# Altium PCB PCB2.PcbDoc
Units mm, origin at the board's own origin, x right, y up, seen from the top; angles counter-clockwise.
Board outline 60 x 60 mm, 2 copper layers (Top Layer, Bottom Layer); 89 components, 68 nets, 306 pads, 0 vias.
Unrouted connection lines stored in the file: 214.
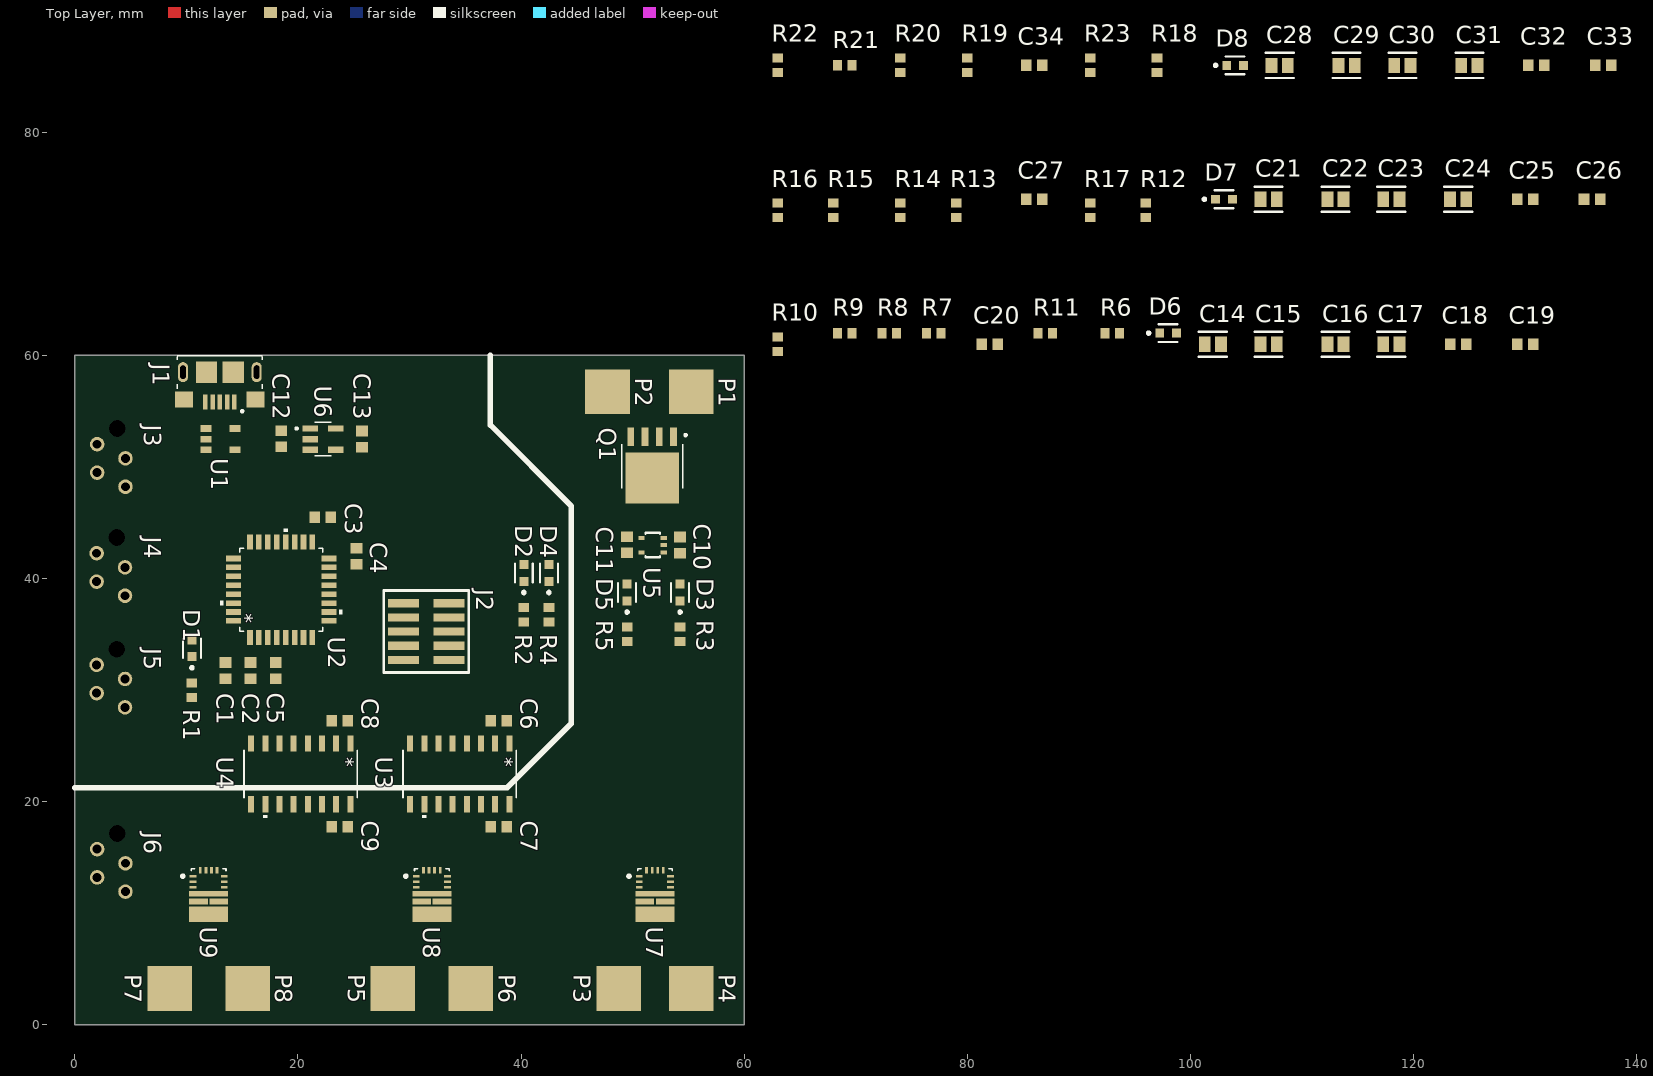
[diagram p0: Top Layer view]
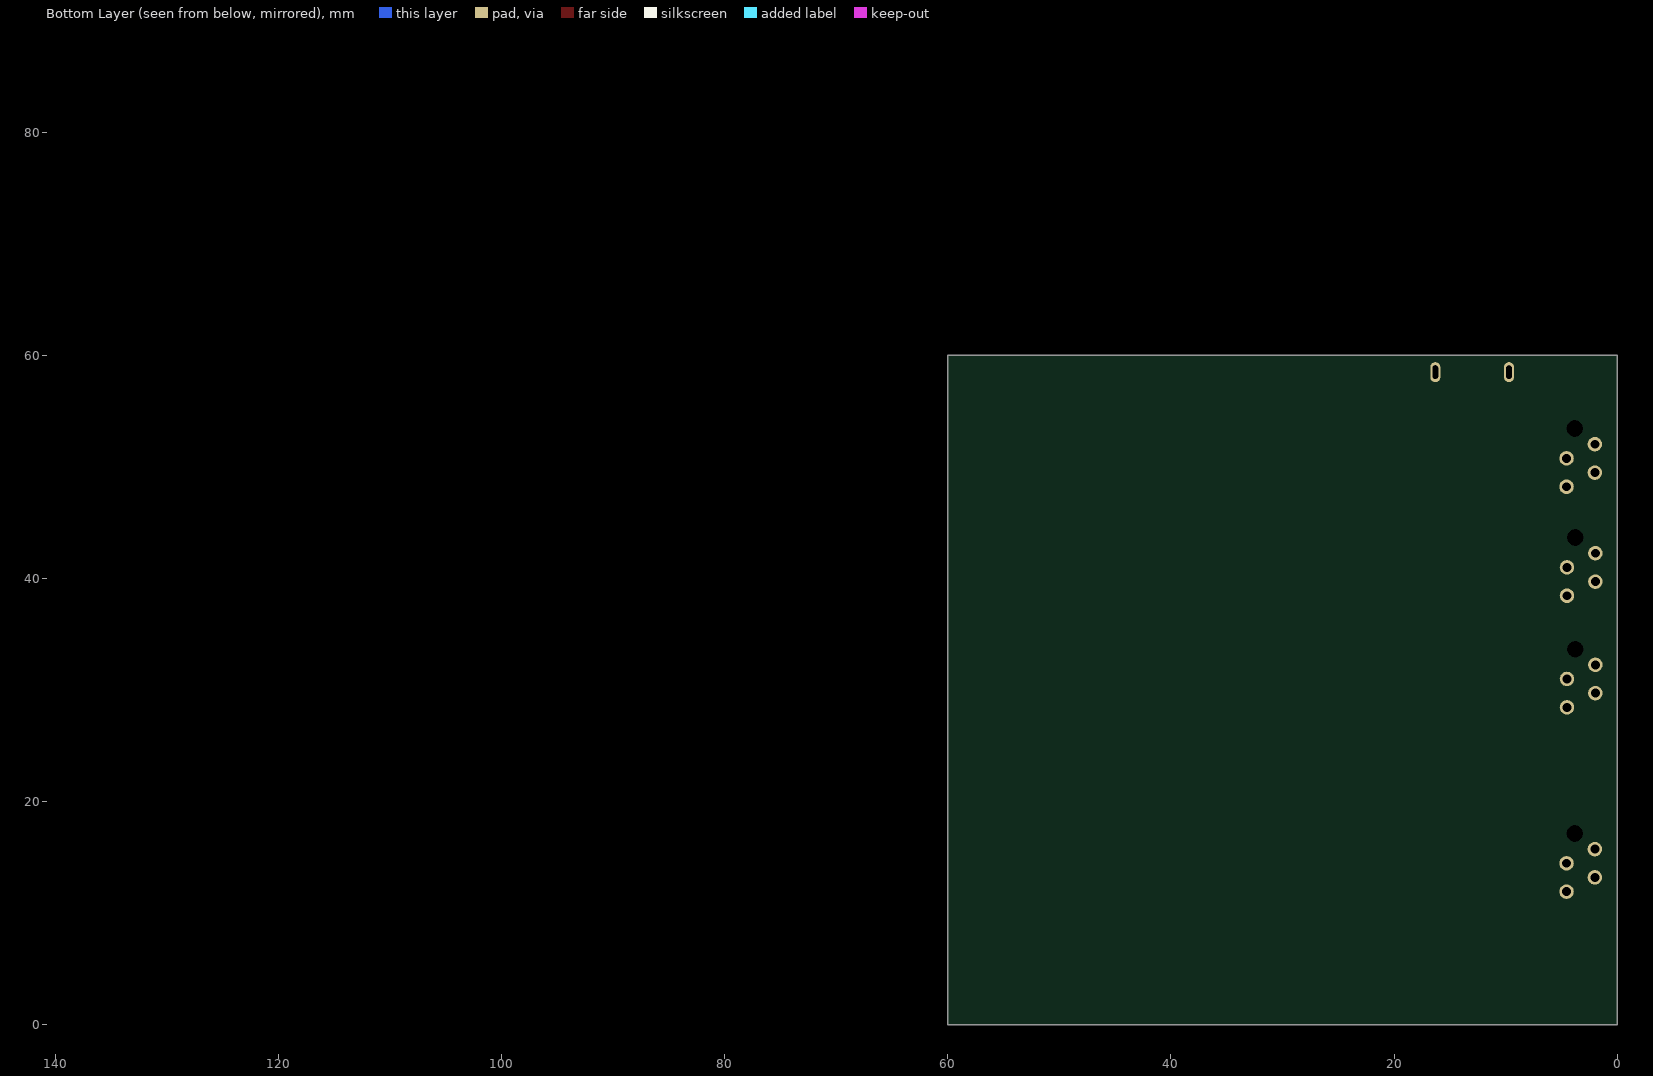
[diagram p1: Bottom Layer view, seen from below]

## Layer stack, top to bottom
Top Solder: solder mask 0.0102, Solder Resist, Dk 3.5
Top Layer: signal copper 0.0356
Dielectric 1: dielectric 0.32, FR-4, Dk 4.8
Bottom Layer: signal copper 0.0356
Bottom Solder: solder mask 0.0102, Solder Resist, Dk 3.5

## Board outline
0,0 60,0 60,60 0,60

## Design rules (kind name [scope] priority, off if disabled: settings)
Clearance [All] p1: gap=0.2 ignorepadtopadclearanceinfootprint=TRUE
PolygonConnect [All] p1: connectstyle=Relief reliefconductorwidth=0.254 reliefentries=4 polygonreliefangle="90 Angle" airgapwidth=0.254
RoutingVias [All] p1: holewidth=0.711 width=1.27 viastyle="Through Hole" minholewidth=0.711 minwidth=1.27 maxholewidth=0.711 maxwidth=1.27
SolderMaskExpansion [All] p1: expansion=0.102 istentingtop=FALSE
Width [All] p1: maxlimit=0.254 minlimit=0.254 preferedwidth=0.254
30 further rules are at their usual default settings.

## Classes and differential pairs
component class MCU_3: C28 C29 C30 C31 C32 C33 C34 D8 R18 R19 R20 R21 R22 R23 U9
component class MCU_2: C21 C22 C23 C24 C25 C26 C27 D7 R12 R13 R14 R15 R16 R17 U8
component class MCU_1: C14 C15 C16 C17 C18 C19 C20 D6 R6 R7 R8 R9 R10 R11 U7
component class mainboard_valdis: C1 C2 C3 C4 C5 C6 C7 C8 C9 C10 C11 C12 C13 D1 D2 D3 D4 D5 J1 J2 J3 J4 J5 J6 P1 P2 P3 P4 P5 P6 P7 P8 Q1 R1 R2 R3 R4 R5 U1 U2 U3 U4 U5 U6

## Components (designator, comment, footprint, x,y, rotation, side; value= is the part's Value field where it differs from the comment)
C1 "4.7uF" CAPC1608X90X35ML10T15 13.5,31.75 r90 top
C2 "100nF" CAPC1608X90X35ML10T15 15.75,31.75 r90 top
C3 "100nF" CAPC1608X90X35ML10T15 22.225,45.5 r180 top
C4 "100nF" CAPC1608X90X35ML10T15 25.25,42 r270 top
C5 "100nF" CAPC1608X90X35ML10T15 18,31.75 r90 top
C6 "100nF" CAPC1608X90X35ML10T15 38,27.25 r0 top
C7 "100nF" CAPC1608X90X35ML10T15 38,17.75 r0 top
C8 "100nF" CAPC1608X90X35ML10T15 23.75,27.25 r0 top
C9 "100nF" CAPC1608X90X35ML10T15 23.75,17.75 r0 top
C10 "1uF" CAPC1608X90X35ML10T15 54.25,43 r90 top
C11 "1uF" CAPC1608X90X35ML10T15 49.5,43.025 r270 top
C12 "1uF" CAPC1608X90X35ML10T15 18.5,52.525 r90 top
C13 "1uF" CAPC1608X90X35ML10T15 25.75,52.5 r90 top
C14 "100uF" FP-CL21-IPC_C 102,61 r0 top
C15 "100uF" FP-CL21-IPC_C 107,61 r0 top
C16 "100uF" FP-CL21-IPC_C 113,61 r0 top
C17 "100uF" FP-CL21-IPC_C 118,61 r0 top
C18 "4.7uF" CAPC1608X90X35ML10T15 124,61 r0 top
C19 "100nF" CAPC1608X90X35ML10T15 130,61 r0 top
C20 "100nF" CAPC1608X90X35ML10T15 82,61 r0 top
C21 "100uF" FP-CL21-IPC_C 107,74 r0 top
C22 "100uF" FP-CL21-IPC_C 113,74 r0 top
C23 "100uF" FP-CL21-IPC_C 118,74 r0 top
C24 "100uF" FP-CL21-IPC_C 124,74 r0 top
C25 "4.7uF" CAPC1608X90X35ML10T15 130,74 r0 top
C26 "100nF" CAPC1608X90X35ML10T15 136,74 r0 top
C27 "100nF" CAPC1608X90X35ML10T15 86,74 r0 top
C28 "100uF" FP-CL21-IPC_C 108,86 r0 top
C29 "100uF" FP-CL21-IPC_C 114,86 r0 top
C30 "100uF" FP-CL21-IPC_C 119,86 r0 top
C31 "100uF" FP-CL21-IPC_C 125,86 r0 top
C32 "4.7uF" CAPC1608X90X35ML10T15 131,86 r0 top
C33 "100nF" CAPC1608X90X35ML10T15 137,86 r0 top
C34 "100nF" CAPC1608X90X35ML10T15 86,86 r0 top
D1 "LTST-C191TBKT" FP-LTST-C191TBKT-MFG 10.5,33.75 r90 top
D2 "LTST-C191TBKT" FP-LTST-C191TBKT-MFG 40.25,40.5 r90 top
D3 "LTST-C191TBKT" FP-LTST-C191TBKT-MFG 54.25,38.75 r90 top
D4 "LTST-C191TBKT" FP-LTST-C191TBKT-MFG 42.5,40.5 r90 top
D5 "LTST-C191TBKT" FP-LTST-C191TBKT-MFG 49.5,38.75 r90 top
D6 "LTST-C191TBKT" FP-LTST-C191TBKT-MFG 98,62 r0 top
D7 "LTST-C191TBKT" FP-LTST-C191TBKT-MFG 103,74 r0 top
D8 "LTST-C191TBKT" FP-LTST-C191TBKT-MFG 104,86 r0 top
J1 "10118193-0001LF" FCI_10118193-0001LF 13,58.5 r180 top
J2 "FTSH-105-01-L-DV-K" FTSH-105-01-XXX-DV-K 31.5,35.25 r90 top
J3 "microMatch4" microMatch4 2,52.04 r90 top
J4 "microMatch4" microMatch4 1.96,42.27 r90 top
J5 "microMatch4" microMatch4 1.96,32.27 r90 top
J6 "microMatch4" microMatch4 2,15.75 r90 top
P1 "BAT+" PCBComponent_1 55.25,56.75 r0 top
P2 "BAT-" PCBComponent_1 47.75,56.75 r0 top
P3 "M1+" PCBComponent_1 48.75,3.25 r0 top
P4 "M1-" PCBComponent_1 55.25,3.25 r0 top
P5 "M2+" PCBComponent_1 28.5,3.25 r0 top
P6 "M2-" PCBComponent_1 35.5,3.25 r0 top
P7 "M3+" PCBComponent_1 8.5,3.25 r0 top
P8 "M3-" PCBComponent_1 15.5,3.25 r0 top
Q1 "BUK6Y10-30PX" TO127P600X120-5N 51.75,50.06 r180 top
R1 "1K" RESC1609X50X30NL8T20 10.5,30 r90 top
R2 "1K" RESC1609X50X30NL8T20 40.25,36.75 r90 top
R3 "1K" RESC1609X50X30NL8T20 54.25,35 r90 top
R4 "1K" RESC1609X50X30NL8T20 42.5,36.75 r90 top
R5 "1K" RESC1609X50X30NL8T20 49.5,35 r90 top
R6 "1K" RESC1609X50X30NL8T20 93,62 r0 top
R7 "0" RESC1609X50X30NL8T20 77,62 r0 top
R8 "4K7" RESC1609X50X30NL8T20 73,62 r0 top
R9 "0" RESC1609X50X30NL8T20 69,62 r0 top
R10 "0" RESC1609X50X30NL8T20 63,61 r90 top
R11 "2K2" RESC1609X50X30NL8T20 87,62 r0 top
R12 "1K" RESC1609X50X30NL8T20 96,73 r90 top
R13 "0" RESC1609X50X30NL8T20 79,73 r90 top
R14 "4K7" RESC1609X50X30NL8T20 74,73 r90 top
R15 "0" RESC1609X50X30NL8T20 68,73 r90 top
R16 "0" RESC1609X50X30NL8T20 63,73 r90 top
R17 "2K2" RESC1609X50X30NL8T20 91,73 r90 top
R18 "1K" RESC1609X50X30NL8T20 97,86 r90 top
R19 "0" RESC1609X50X30NL8T20 80,86 r90 top
R20 "4K7" RESC1609X50X30NL8T20 74,86 r90 top
R21 "0" RESC1609X50X30NL8T20 69,86 r0 top
R22 "0" RESC1609X50X30NL8T20 63,86 r90 top
R23 "2K2" RESC1609X50X30NL8T20 91,86 r90 top
U1 "CM1223" SOT23-5 11.75,52.5 r270 top
U2 "STM32G441KBT3" LQFP32_7X7_STM 18.5,39 r90 top
U3 "MAX14930DASE+" 21-0041_S16+1_MXM 34.5,22.5 r270 top
U4 "MAX14930DASE+" 21-0041_S16+1_MXM 20.25,22.5 r270 top
U5 "NCV8730ASN500T1G" TSSOP5 51.75,43 r90 top
U6 "NCP164CSN330T1G" SOP95P275X110-5N 22.25,52.5 r0 top
U7 "PDRV8243HRXYQ1" RXY0014A-MFG 52,11.7 r0 top
U8 "PDRV8243HRXYQ1" RXY0014A-MFG 32,11.7 r0 top
U9 "PDRV8243HRXYQ1" RXY0014A-MFG 12,11.7 r0 top

## Footprints (in the part's own frame and the unit in brackets; to place one, negate y for a bottom-side part, rotate by r counter-clockwise, add the part's x,y. Pads: shape width x height; smd on the part's side, far side on the other; paste and mask are expansions set on the pad)
21-0041_S16+1_MXM [mm]
  rect 1.456x0.533 smd paste+0 mask+0: 1(-2.722,4.445) 2(-2.722,3.175) 3(-2.722,1.905) 4(-2.722,0.635) 5(-2.722,-0.635) 6(-2.722,-1.905) 7(-2.722,-3.175) 8(-2.722,-4.445) 9(2.722,-4.445) 10(2.722,-3.175) 11(2.722,-1.905) 12(2.722,-0.635) 13(2.722,0.635) 14(2.722,1.905) 15(2.722,3.175) 16(2.722,4.445)
  silkscreen extent -2.12,-5.08 3.96,5.08, body extent -3.1,-4.95 3.1,4.95, height 1.76
CAPC1608X90X35ML10T15 [mm] "Chip Capacitor, 2-Leads, Body 1.7x0.9mm, IPC Low Density"
  rect 0.95x1.05 smd: 1(-0.725,0) 2(0.725,0)
  body extent -0.85,-0.45 0.85,0.45, height 0.9
FCI_10118193-0001LF [mm]
  rect 0.4x1.35 smd: 1(-1.3,2.675) 2(-0.65,2.675) 3(0,2.675) 4(0.65,2.675) 5(1.3,2.675)
  rect 1.6x1.4 smd: S1(-3.2,2.45) S2(3.2,2.45)
  rect 1.9x1.9 smd: S3(1.2,0) S4(-1.2,0)
  oval 0.9x1.8 hole 0.5 slot 1.2 at 90 deg: S5(-3.3,0) S6(3.3,0)
  silkscreen extent -3.8,-1.45 3.8,3.6
FP-CL21-IPC_C [mm]
  rect 1.055x1.356 smd paste+0 mask+0: 1(-0.726,0) 2(0.726,0)
  silkscreen extent -1.25,-1.12 1.25,1.12, body extent -1.35,-0.82 1.35,0.82, height 0.25
FP-LTST-C191TBKT-MFG [mm]
  rect 0.8x0.8 smd paste+0 mask+0: 1(-0.75,0) 2(0.75,0)
  silkscreen extent -1.87,-0.8 0.85,0.8, body extent -1.25,-0.55 1.25,0.55, height 0.25
FTSH-105-01-XXX-DV-K [mil]
  rect 29x110 smd mask+2: 1(-100,-80) 2(-100,80) 3(-50,-80) 4(-50,80) 5(0,-80) 6(0,80) 7(50,-80) 8(50,80) 9(100,-80) 10(100,80)
  silkscreen extent -145,-150 145,150
LQFP32_7X7_STM [mm]
  rect 1.359x0.501 smd paste+0 mask+0: 1(-4.274,2.8) 2(-4.274,2) 3(-4.274,1.2) 4(-4.274,0.4) 5(-4.274,-0.4) 6(-4.274,-1.2) 7(-4.274,-2) 8(-4.274,-2.8) 17(4.274,-2.8) 18(4.274,-2) 19(4.274,-1.2) 20(4.274,-0.4) 21(4.274,0.4) 22(4.274,1.2) 23(4.274,2) 24(4.274,2.8)
  rect 0.501x1.359 smd paste+0 mask+0: 9(-2.8,-4.274) 10(-2,-4.274) 11(-1.2,-4.274) 12(-0.4,-4.274) 13(0.4,-4.274) 14(1.2,-4.274) 15(2,-4.274) 16(2.8,-4.274) 25(2.8,4.274) 26(2,4.274) 27(1.2,4.274) 28(0.4,4.274) 29(-0.4,4.274) 30(-1.2,4.274) 31(-2,4.274) 32(-2.8,4.274)
  silkscreen extent -3.72,-5.46 5.46,5.46, body extent 0,0 0.25,0.25, height 0.25
microMatch4 [mm]
  round 1.3 hole 0.8: 1(0,0) 2(-1.27,-2.54) 3(-2.54,0) 4(-3.81,-2.54)
  round 0 hole 1.5 unplated: drill(1.4,-1.8)
  body extent -5.41,-3.77 1.6,1.23, height 4
PCBComponent_1 [mm]
  rect 4x4 smd: 1(0,0)
RESC1609X50X30NL8T20 [mm] "Chip Resistor, 2-Leads, Body 1.65x0.95mm, IPC Medium Density"
  rect 0.8x0.95 smd: 1(-0.65,0) 2(0.65,0)
  body extent -0.82,-0.48 0.82,0.48, height 0.5
RXY0014A-MFG [mm]
  rect 0.6x0.25 smd paste+0 mask-0.292: 1(-1.4,1.625) 2(-1.4,1.125) 3(-1.4,0.625) 8(1.4,0.625) 9(1.4,1.125) 10(1.4,1.625)
  rect 3.5x0.5 smd paste-1.737 mask-1.74: 4(0,0.05)
  rect 1.675x0.5 smd paste-0.825 mask-0.826: 5(-0.913,-0.65) 7(0.913,-0.65)
  rect 3.5x1.4 smd paste-1.737 mask-1.74: 6(0,-1.8)
  rect 0.25x0.6 smd paste+0 mask-0.292: 11(0.75,2.15) 12(0.25,2.15) 13(-0.25,2.15) 14(-0.75,2.15)
  silkscreen extent -2.45,1.5 1.55,2.3, body extent 0,0 0.25,0.25, height 0.25
SOP95P275X110-5N [mm]
  rect 1.42x0.58 smd: 1(-1.145,0.95) 2(-1.145,0) 3(-1.145,-0.95) 4(1.145,-0.95) 5(1.145,0.95)
  silkscreen extent -2.46,-1.5 0.75,1.5
SOT23-5 [mm] "SOT143-4 as used in SP0503BAHTG"
  round 0.4 on Top Overlay: 1(-1.7,0)
  rect 0.6x1 smd: 1(-0.95,0) 2(0,0) 3(0.95,0) 4(0.95,2.6) 5(-0.95,2.6)
  body extent -1.46,0.13 1.46,2.47, height 1
TO127P600X120-5N [mm]
  rect 0.6x1.62 smd: 1(-1.905,-2.65) 2(-0.635,-2.65) 3(0.635,-2.65) 4(1.905,-2.65)
  rect 4.8x4.58 smd paste-3: 5(0,1.06)
  silkscreen extent -3.1,-2.9 2.72,1.97
TSSOP5 [mm]
  rect 0.35x0.55 smd: 1(-0.65,-1.04) 2(0,-1.04) 3(0.65,-1.04) 4(0.65,0.95) 5(-0.65,0.94)
  silkscreen extent -1.1,-0.7 1.1,0.6

## Part data
C1 C2 C3 C4 C5 C6 C7 C8 C9 C10 C11 C12 C13 C18 C19 C20 C25 C26 C27 C32 C33 C34: library part CMP-2000-04945-1, "Chip Capacitor, 22 pF, +/- 5%, 50 V, -55 to 125 degC, 0603 (1608 Metric), RoHS, Tape and Reel", Capacitance=22pF, Case Size/Dimension=0603, Dielectric=C0G, Manufacturer=Murata, Package Description="2-Pin Surface Mount Device, Body 1.6 x 0.8 mm", Package Reference=603, Rated Voltage=50V, Tolerance (%)=±5%, Datasheet URL=https://datasheet.ciiva.com/11786/0900766b807a1cab-11786398.pdf, Datasheet Version=Jul-06, Manufacturer URL=http://www.murata.com/
C14 C15 C16 C17 C21 C22 C23 C24 C28 C29 C30 C31: library part CMP-13271-003225-1, "CL21 Series 0805 22uF 25V ±20% Tolerance X5R Multilayer Ceramic Chip Capacitor"
D1 D2 D3 D4 D5 D6 D7 D8: library part CMP-22017-000008-1, "LED BLUE CLEAR CHIP SMD", Case Code (Imperial)=0603, Case Code (Metric)=1608, Color=Blue, Forward Current=20mA, Forward Voltage=3.8V, Lens Color=Colorless, Max Operating Temperature=80°C, Max Power Dissipation=75mW, Min Operating Temperature=-20°C, Package Quantity=1, Power Dissipation=76mW, Reverse Voltage=5V, Case/Package=0603, Depth=1.6mm, Dominant Wavelength=475nm, Height=0.55mm, Illumination Color=Blue, Lead Free="Lead Free", Length=0.8mm, Lens Style=Diffused, Lens Transparency=Clear, Luminous Intensity=180mcd, Mount="Surface Mount", Number of Elements=1, Number of LEDs=1, Number of Pins=2, Packaging="Tape and Reel", Radiation Hardening=No, Test Current=20mA, Viewing Angle=130°, Wavelength=468nm, Width=0.8mm
J1: "USB - micro B USB 2.0 Receptacle Connector 5 Position Surface Mount, Right Angle; Through Hole", Package=None, Availability=Unavailable, MF="Amphenol ICC", MP=10118193-0001LF, Price=None, SnapEDA_Link=https://www.snapeda.com/parts/10118193-0001LF/Amphenol%20FCI/view-part/2758989/?ref=snap
P1 P2 P3 P4 P5 P6 P7 P8: library part Pad4x4
R1 R2 R3 R4 R5 R6 R7 R8 R9 R10 R11 R12 R13 R14 R15 R16 R17 R18 R19 R20 R21 R22 R23: library part CMP-2000-03816-5, "Chip Resistor, 0 Ohm, Jumper, 100 mW, -55 to 155 degC, 0603 (1608 Metric), RoHS, Tape and Reel", Manufacturer="Vishay Semiconductor", Max Operating Temperature="155 degC", Min Operating Temperature="-55 degC", Package Quantity=5000, Voltage Rating="75 V", ComponentLink1Description="Manufacturer URL", ComponentLink1URL=http://www.vishay.com/, ComponentLink2Description=Datasheet, ComponentLink2URL=http://www.vishay.com/docs/20035/dcrcwe3.pdf, DatasheetVersion=06/2012, Height="0.45 mm", Length="1.55 mm", Mount="Surface Mount", Mounting Technology="Surface Mount", PackageDescription="2-Pin Surface Mount Device, Body 1.575 x 0.85 mm", PackageReference=0603, Packaging="Tape and Reel", Pins=2, REACH SVHC=Unknown, RoHSCompliant=true
U2: "No Description Available", Built_By=EMA_Cory, Copyright="Copyright (C) 2018 Accelerated Designs. All rights reserved", Datasheet=https://www.st.com/resource/en/datasheet/stm32g441kb.pdf, Manufacturer_Part_Number=STM32G441KBT3, RefDes=RefDes, SourceLibrary=Add_to_database_2020-11-05, Type=DEV, Vendor=STMicroelectronics
U7 U8 U9: "No Description Available", Mfr_Name="Texas Instruments", Copyright="Copyright (C) 2022 Ultra Librarian. All rights reserved.", Manufacturer_Part_Number=PDRV8243HRXYQ1, RefDes=RefDes, Type=DEV

## Nets (pads, with @x,y where several pads share a name; then routed paths per layer and width w, separated by ;. In a path a pad name is that pad's centre, name@x,y a point inside that pad or via, vN(x,y) a via of type N, cw(c..) or ccw(c..) an arc to the next point about the centre after c; other vN are vias at no path point)
+3.3V: C1.2 C2.2 C3.2 C4.2 C6.2 C8.2 C13.2 D2.2 J2.1 J3.2 J4.2 J5.2 U2.1 U2.15 U2.17 U3.1 U4.1 U6.5
+5: C7.2 C9.2 C11.2 C20.2 C27.2 C34.2 D5.2 R6.2 R12.2 R18.2 U3.16 U4.16 U5.5
+5VA: C12.2 D4.2 J1.1 U1.5 U6.1 U6.3
+16V: C10.2 C14.1 C15.1 C16.1 C17.1 C18.2 C19.2 C21.1 C22.1 C23.1 C24.1 C25.2 C26.2 C28.1 C29.1 C30.1 C31.1 C32.2 C33.2 D3.2 Q1.5 U5.1 U5.3 U7.4 U8.4 U9.4
GND: C1.1 C2.1 C3.1 C4.1 C5.1 C6.1 C8.1 C12.1 C13.1 J1.5 J1.S1 J1.S2 J1.S3 J1.S4 J1.S5 J1.S6 J2.3 J2.5 J2.9 J3.1 J4.1 J5.1 R1.1 R2.1 R4.1 U1.2 U2.14 U2.16 U2.32 U3.2 U3.8 U4.2 U4.8 U6.2
GNDB: C7.1 C9.1 C10.1 C11.1 C14.2 C15.2 C16.2 C17.2 C18.1 C19.1 C20.1 C21.2 C22.2 C23.2 C24.2 C25.1 C26.1 C27.1 C28.2 C29.2 C30.2 C31.2 C32.1 C33.1 C34.1 J6.1 R3.1 R5.1 R7.1 R8.1 R9.1 R10.1 R11.1 R13.1 R14.1 R15.1 R16.1 R17.1 R19.1 R20.1 R21.1 R22.1 R23.1 U3.9 U3.15 U4.9 U4.15 U5.2 U7.6 U7.8 U8.6 U8.8 U9.6 U9.8
M1_DIR_A: U2.10 U3.4
M1_DIR_B: U3.13 U7.10
M1_ENC_A: J3.3 U2.18
M1_ENC_B: J3.4 U2.19
M1_PWM_A: U2.5 U3.3
M1_PWM_B: U3.14 U7.9
M2_DIR_A: U2.11 U3.6
M2_DIR_B: U3.11 U8.10
M2_ENC_A: J4.3 U2.27
M2_ENC_B: J4.4 U2.28
M2_PWM_A: U2.6 U3.5
M2_PWM_B: U3.12 U8.9
M3_DIR_A: U2.12 U4.4
M3_DIR_B: U4.13 U9.10
M3_ENC_A: J5.3 U2.30
M3_ENC_B: J5.4 U2.29
M3_PWM_A: U2.7 U4.3
M3_PWM_B: U4.14 U9.9
NetD1_1: D1.1 R1.2
NetD1_2: D1.2 U2.2
NetD2_1: D2.1 R2.2
NetD3_1: D3.1 R3.2
NetD4_1: D4.1 R4.2
NetD5_1: D5.1 R5.2
NetD6_1: D6.1 U7.1
NetD6_2: D6.2 R6.1
NetD7_1: D7.1 U8.1
NetD7_2: D7.2 R12.1
NetD8_1: D8.1 U9.1
NetD8_2: D8.2 R18.1
NetP1_1: P1.1 Q1.1 Q1.2 Q1.3
NetP2_1: P2.1 Q1.4
NetP3_1: P3.1 U7.5
NetP4_1: P4.1 U7.7
NetP5_1: P5.1 U8.5
NetP6_1: P6.1 U8.7
NetP7_1: P7.1 U9.5
NetP8_1: P8.1 U9.7
NetR7_2: R7.2 U7.14
NetR8_2: R8.2 U7.13
NetR9_2: R9.2 U7.12
NetR10_2: R10.2 U7.11
NetR11_2: R11.2 U7.2
NetR13_2: R13.2 U8.14
NetR14_2: R14.2 U8.13
NetR15_2: R15.2 U8.12
NetR16_2: R16.2 U8.11
NetR17_2: R17.2 U8.2
NetR19_2: R19.2 U9.14
NetR20_2: R20.2 U9.13
NetR21_2: R21.2 U9.12
NetR22_2: R22.2 U9.11
NetR23_2: R23.2 U9.2
NRST: C5.2 J2.10 U2.4
SLEEP_n: U2.26 U4.5
SLEEP_nB: U4.12 U7.3 U8.3 U9.3
SWCLK: J2.4 U2.24
SWDIO: J2.2 U2.23
TRW_PWM: U2.8 U4.6
TRW_PWM_B: J6.2 U4.11
USB+: J1.3 U1.3 U2.22
USB-: J1.2 U1.4 U2.21
pads on no net: J1.4 J2.6 J2.7 J2.8 J3.drill J4.drill J5.drill J6.3 J6.4 J6.drill U1.1 U2.3 U2.9 U2.13 U2.20 U2.25 U2.31 U3.7 U3.10 U4.7 U4.10 U5.4 U6.4

## Silkscreen, mask and mechanical layers (free items; w line width, h text height)
Top Overlay:
  lines w0.5: 0,21.25 38.75,21.25 44.5,27 44.5,46.5 37.25,53.75 37.25,60
Mechanical 1:
  the board outline again, w0.5

## Text inside footprints (layer, text, board x,y; h text height)
U2: Top Overlay "*" at 16.5,36 h1.27 r90; Mechanical 13 "*" at 15.935,35.469 h1.27 r90
U3: Top Overlay "*" at 38,24 h1.27 r270; Mechanical 13 "*" at 38.107,24.43 h1.27 r270
U4: Top Overlay "*" at 23.75,24 h1.27 r270; Mechanical 13 "*" at 23.857,24.43 h1.27 r270